# Altium PCB ArgoFCRev2.PcbDoc (part 3 of 6)
Units mm, origin at the board's own origin, x right, y up, seen from the top; angles counter-clockwise.
Board outline 140.21 x 119.63 mm, 4 copper layers (Top Layer, GND Plane, PWR Plane, Bottom Layer), stack 0.603 mm thick; 413 components, 223 nets, 1421 pads, 793 vias.
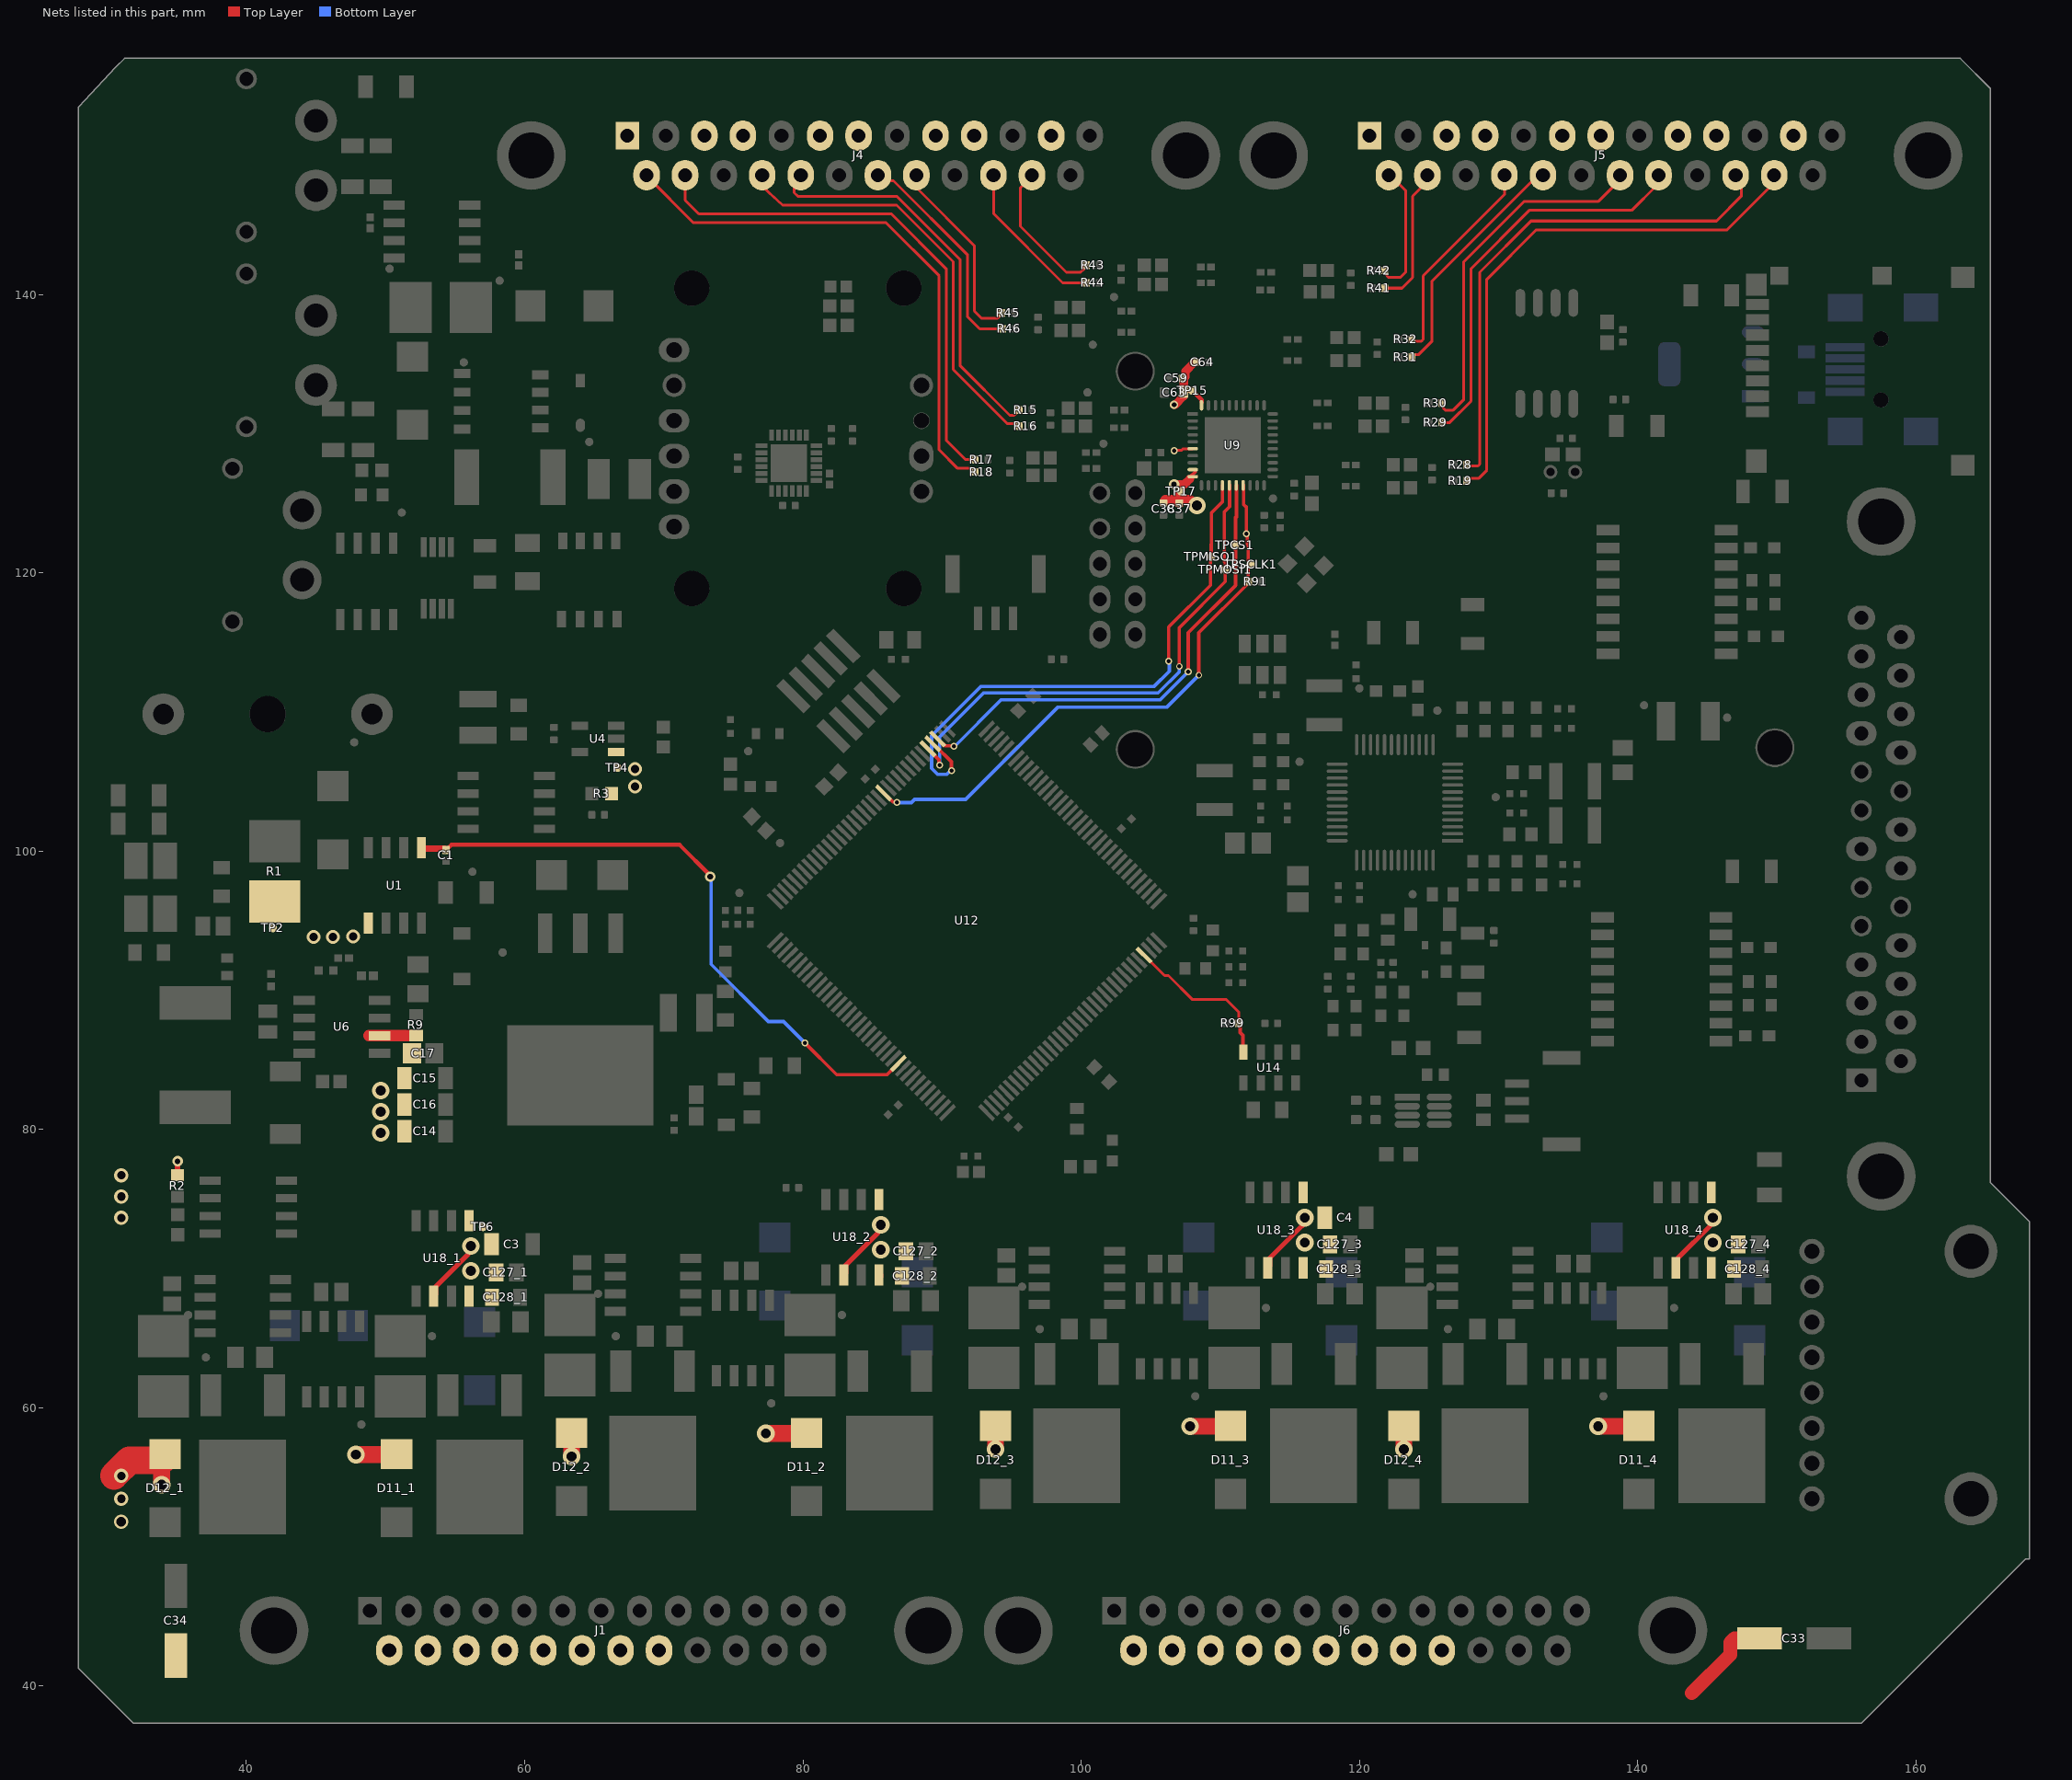
[diagram p4: the nets of this part, all layers, seen from the top]

## Part data (continued)
R49: library part CMP-009-00199-1, "Chip Resistor, 120 Ohm, +/- 1%, 100 mW, -55 to 155 degC, 0603 (1608 Metric)", Case/Package=0603, Max Operating Temperature=155°C, Min Operating Temperature=-55°C, Power=100mW, Tolerance=1%, Voltage Rating=75V, Mounting Technology=SM, Pins=2, RoHS Compliant=True
R51 R52 R60 R62 R64 R73 R74 R76: library part CMP-2000-04818-3, "RES 10KΩ 1.00% 0.1W 0603", Case Code (Imperial)=0603, Case Code (Metric)=1608, Max Operating Temperature=155°C, Max Power Dissipation=100mW, Min Operating Temperature=-55°C, Package Quantity=1, Ratings=AEC-Q200, Resistance=10kR, Resistor Type="Thick Film", Temperature Coefficient=100ppm/°C, Tolerance=1%, Voltage Rating=50V, Case/Package=0603, Construction=Rectangular, Depth=0.8mm, Features="Moisture Resistant", Height=0.45mm, Lead Free="Lead Free", Length=1.6mm, Military Standard=Not, Mount="Surface Mount", Number of Terminations=2, Packaging="Tape and Reel", Power Rating=100mW, RoHS Compliant=Yes, Series=AC, Size Code=0603, Termination=SMD/SMT, Width=0.8mm
R53 R59: library part CMP-2001-00644-1, "4.7 kOhms ±0.1% 0.125W, 1/8W Chip Resistor 0805 (2012 Metric) Automotive AEC-Q200 Thin Film", Manufacturer=Panasonic, Part Number=ERA6AEB472V
R54: library part CMP-2001-04399-1, "11.8 kOhms ±1% 0.125W, 1/8W Chip Resistor 0805 (2012 Metric) Automotive AEC-Q200 Thick Film", Manufacturer=Panasonic, Part Number=ERJ-6ENF1182V
R55 R56 R57 R58 R69 R70 R71 R72: library part CMP-2000-04466-2, "RES SMD 49.9 OHM 0.1% 1/10W 0603", Manufacturer=Yageo, Manufacturer Part Number=RT0603BRD0749R9L, Package=RT0603, Power Rating=0.1W, Temperature="-55°C to +155°C", Temperature Coefficient="25 ppm/°C", Temperature Range High=+155°C, Temperature Range Low=-55°C, Tolerance=0.001, Voltage Rating=75V, Automotive=No, Category=Res, ComponentLink2Description=Datasheet, ComponentLink2URL=http://www.yageo.com/documents/recent/PYu-RT_1-to-0.01_RoHS_L_9.pdf, Composition="Thin Film", Device Class L1="Passive Components", Device Class L2=Resistors, Device Class L3="Chip SMD Resistors", Digikey Description="RES SMD 49.9 OHM 0.1% 1/10W 0603", Footprint Url=http://www.yageo.com/exep/pages/download/literatures/PYu-R_Mount_10.pdf, Height=0.55mm, Ipc Land Pattern Name=RESC16080X45, Lead Free=Yes, Mouser Description="Res Thin Film 0603 49.9 Ohm 0.1% 1/10W ±25ppm/°C Molded SMD SMD Paper T/R", Octopart=https://octopart.com/rt0603brd0749r9l-yageo-1274115, Resistance=49.9Ω, RoHS=TRUE, Series=RT
R61 R65 R75: library part CMP-009-00014-5, "Chip Resistor, 1 KOhm, +/-1%, 0.1 W, -55 to 155 degC, 0603 (1608 Metric)", Case/Package=0603, Max Operating Temperature=155°C, Min Operating Temperature=-55°C, Power=100mW, Tolerance=1%, Voltage Rating=50V, Mounting Technology=SM, Pins=2, RoHS Compliant=True
R63 R66 R67 R68 R78 R79 R80 R82: library part CMP-03412-022448-1, "RES SMD 75 OHM 0.5% 1/10W 0603", Manufacturer=Yageo, Manufacturer Part Number=RT0603DRE0775RL, Package=RT0603, Power Rating=0.1W, Temperature="-55°C to +155°C", Temperature Coefficient="50 ppm/°C", Temperature Range High=+155°C, Temperature Range Low=-55°C, Tolerance=0.005, Voltage Rating=75V, Automotive=No, Category=Res, ComponentLink2Description=Datasheet, ComponentLink2URL=http://www.yageo.com/documents/recent/PYu-RT_1-to-0.01_RoHS_L_9.pdf, Composition="Thin Film", Device Class L1="Passive Components", Device Class L2=Resistors, Device Class L3="Chip SMD Resistors", Digikey Description="RES SMD 75 OHM 0.5% 1/10W 0603", Footprint Url=http://www.yageo.com/exep/pages/download/literatures/PYu-R_Mount_10.pdf, Height=0.55mm, Ipc Land Pattern Name=RESC16080X45, Lead Free=Yes, Octopart=https://octopart.com/rt0603dre0775rl-yageo-1170737, Resistance=75Ω, RoHS=TRUE, Series=RT
R77 R81 R83 R84: library part CMP-03412-006815-1, "RES SMD 220 OHM 1% 1/10W 0603", Manufacturer=Yageo, Manufacturer Part Number=RT0603FRE07220RL, Package=RT0603, Power Rating=0.1W, Temperature="-55°C to +155°C", Temperature Coefficient="50 ppm/°C", Temperature Range High=+155°C, Temperature Range Low=-55°C, Tolerance=0.01, Voltage Rating=75V, Automotive=No, Category=Res, ComponentLink2Description=Datasheet, ComponentLink2URL=http://www.yageo.com/documents/recent/PYu-RT_1-to-0.01_RoHS_L_9.pdf, Composition="Thin Film", Device Class L1="Passive Components", Device Class L2=Resistors, Device Class L3="Chip SMD Resistors", Digikey Description="RES SMD 220 OHM 1% 1/10W 0603", Footprint Url=http://www.yageo.com/exep/pages/download/literatures/PYu-R_Mount_10.pdf, Height=0.55mm, Ipc Land Pattern Name=RESC16080X45, Lead Free=Yes, Mouser Description="Thin Film Resistors 1/10W 220 ohm 1% 50ppm", Octopart=https://octopart.com/rt0603fre07220rl-yageo-39861932, Resistance=220Ω, RoHS=TRUE, Series=RT
R101: library part CMP-2003-04797-2, "RES Thick Film, 0Ω, 0.25W, 1206", Case Code (Imperial)=1206, Case Code (Metric)=3216, Max Operating Temperature=155°C, Max Power Dissipation=250mW, Min Operating Temperature=-55°C, Package Quantity=10000, Resistance=0mR, Voltage Rating=200V, Case/Package=1206, Composition="Thick Film", Contact Plating=Tin, Depth=1.6mm, Features="Automotive AEC-Q200", Height=0.024inch, Lead Free="Lead Free", Length=3.2mm, Military Standard=Not, Number of Terminations=2, Packaging="Tape and Reel", Power Rating=250mW, Radiation Hardening=No, Termination=SMD/SMT, Voltage Rating (DC)=200V, Weight=0.000353oz, Width=0.063inch
R106: library part CMP-26527-004126-1, "0Ω ±Jumper 0.5W 1210 Thick Film Chip Resistor AEC-Q200 compliant / Don't PCBA this", Case Code (Imperial)=1210, Case Code (Metric)=3225, Max Operating Temperature=155°C, Max Power Dissipation=500mW, Min Operating Temperature=-55°C, Power Rating=330mW, Resistance=0R, Resistor Type="Thick Film", Tolerance=1%, Case/Package=1210, Contact Plating=Tin, Features="Automotive AEC-Q200", Height=0.028inch, Lead Free="Lead Free", Length=0.126inch, Mount="Surface Mount", Number of Terminations=2, Packaging="Tape and Reel", Radiation Hardening=No, RoHS Compliant=Yes, Series=RMCF, Size Code=1210, Width=0.098inch
R107: library part CMP-03412-033857-1, "RES SMD 10 OHM 1% 1W 2512", Manufacturer=Yageo, Manufacturer Part Number=AC2512FK-0710RL, Package=AC2512, Power Rating=1W, Resistance=10Ω, Temperature="-55°C to +155°C", Temperature Range High=+155°C, Temperature Range Low=-55°C, Tolerance=0.01, Voltage Rating=200V, Automotive=Yes, Automotive Grade="Grade 0", Category=Res, ComponentLink2Description=Datasheet, ComponentLink2URL=http://www.yageo.com/documents/recent/PYu-AC_51_RoHS_L_6.pdf, Composition="Thick Film", Device Class L1="Passive Components", Device Class L2=Resistors, Device Class L3="Chip SMD Resistors", Digikey Description="RES SMD 10 OHM 1% 1W 2512", Footprint Url=http://www.yageo.com/exep/pages/download/literatures/PYu-R_Mount_10.pdf, Height=0.65mm, Ipc Land Pattern Name=RESC635310X55, Lead Free=Yes, Octopart=https://octopart.com/ac2512fk-0710rl-yageo-71369736, RoHS=TRUE, Series=AC
R108: library part CMP-03211-004788-1, "CRGP 1206 10K 1%       / 1206W4F1002T5E", Ambient Temperature Range High=+70°C, Manufacturer=TE, Manufacturer Part Number=CRGP1206F10K, Package=CRGP1206, Power Rating=0.5W, Resistance=10KΩ, Temperature="-55°C to +155°C", Temperature Coefficient=±100ppm/°C, Temperature Range High=+155°C, Temperature Range Low=-55°C, Tolerance=0.01, Voltage Rating=200V, Automotive=No, Category=Res, ComponentLink2Description=Datasheet, ComponentLink2URL=https://www.mouser.com/datasheet/2/418/NG_DS_9-1773463-9_A-1358566.pdf, Composition="Thick Film", Device Class L1="Passive Components", Device Class L2=Resistors, Device Class L3="Chip SMD Resistors", Digikey Description="CRGP 1206 10K 1%", Height=0.65mm, Ipc Land Pattern Name=RESC310155X55, Lead Free=Yes, Octopart=https://octopart.com/crgp1206f10k-te+connectivity-91018843, RoHS=TRUE, Series=CRGP
RT1: library part CMP-06022-000553-2, "NTC Thermistor for Temperature Sensor, 0603, 47kΩ, 5%, 0.046mA, 5V", Case Code (Imperial)=0603, Case Code (Metric)=1608, Current Rating=140uA, Max Operating Temperature=125°C, Max Power Dissipation=100mW, Min Operating Temperature=-40°C, Package Quantity=4000, Resistance=47kR, Resistance Tolerance=5%, Accuracy=0.5%, Case/Package=0603, Depth=0.8mm, Height=0.8mm, Lead Free="Lead Free", Length=1.6mm, Mount="Surface Mount", Number of Pins=2, Packaging="Tape and Reel", Power Rating=100mW, Radiation Hardening=No, REACH SVHC="No SVHC", Series=NCP, Termination=SMD/SMT, Thickness=150um, Tolerance=5%, Width=0.8mm
T1 T2: library part CMP-2000-05323-2, "MODULE XFRMR SGL ETHR LAN 16SOIC", Case/Package=Module, DC Resistance (DCR)=1.5R, Isolation Voltage=1.5kV, Max Operating Temperature=85°C, Min Operating Temperature=-40°C, Package Quantity=40, Depth=9.53mm, Height=5.97mm, Height - Seated (Max)=6.22mm, Insertion Loss=-1dB, Lead Free="Lead Free", Lead/Base Style="Gull Wing", Length=12.7mm, Mount="Surface Mount", Number of Pins=16, Packaging=Rail/Tube, Radiation Hardening=No, Return Loss=-12dB, RoHS Compliant=Yes, Series=-, Shielding=Unshielded, Termination=SMD/SMT, Turns Ratio=1:1, Width=7.11mm
U1 U17_1 U17_2 U17_3 U17_4 U19_1 U19_2 U19_3 U19_4 U20: "Integrated Circuit", Manufacturer_Name="Texas Instruments", Mouser Part Number=595-INA240A4DR, Arrow Part Number=INA240A4DR, Arrow Price/Stock=https://www.arrow.com/en/products/ina240a4dr/texas-instruments?region=nac, Datasheet Link=http://www.ti.com/lit/gpn/ina240, Height=1.75mm, Manufacturer_Part_Number=INA240A4DR, Mouser Price/Stock=https://www.mouser.co.uk/ProductDetail/Texas-Instruments/INA240A4DR?qs=AQlKX63v8RvMrT%252BbhA5gog%3D%3D
U2 U3 U22: library part CMP-014-00017-2, "Single Supply Dual Operational Amplifier, 3 to 32 V, 0 to 70 degC, 8-Pin SOIC, Pb-Free, Tape and Reel", Case/Package=SOIC, Manufacturer="ON Semiconductor", Max Dual Supply Voltage=16V, Max Input Voltage=28.3V, Max Operating Temperature=70°C, Max Supply Voltage=44V, Min Dual Supply Voltage=1.5V, Min Input Voltage=0uV, Min Operating Temperature=0°C, Min Supply Voltage=2.3V, Nominal Dual Supply Voltage=12V, Nominal Supply Current=35uA, Nominal Voltage Gain=100dB, Output Current=40mA, Package Description="8-Pin Small Outline Integrated Circuit, Body 4.9 x 3.9 mm, Pitch 1.27 mm", Package Quantity=2500, Package Reference=SOIC-8-751-07, Channels=2, Common Mode Rejection Ratio=65dB, Datasheet URL=http://www.onsemi.cn/pub_link/Collateral/LM358-D.PDF, Datasheet Version="Rev. 32, 10/2016", Manufacturer URL=http://www.onsemi.com/, Mounting Technology=SM, Nominal Gain Bandwith Product=200KHz, Nominal Supply Voltage=12V, Packaging=TapeandReel, Pins=8, RoHS Compliant=True, Slew Rate=0.07V/us
U4: "Integrated Circuit", Manufacturer_Name=Silergy, Datasheet Link=https://datasheet.lcsc.com/szlcsc/Silergy-Corp-SY6280AAAC_C207620.pdf, Height=1.4mm, Manufacturer_Part_Number=SY6280AAAC
U5: library part CMP-0062-00591-5, "5A Low Dropout Positive Regulators, 3-pin TO-263, Pb-Free", Manufacturer="Texas Instruments", PackageTopMarking=NSUZXYTTE#*LM1084*IS-3.3, PartNumber=LM1084IS-3.3/NOPB, PowerWise=N, Code_JEDEC=MO-169-AA, ComponentLink1Description="Datasheet URL", ComponentLink1URL=http://www.ti.com/general/docs/lit/getliterature.tsp?genericPartNumber=LM1084&fileType=pdf, CompType="LDO IC", High-Reliability=Y, PackageDescription="TO-263, Molded, .400 x .390 x .180in, 3 Lead, .1in Pitch, Surface Mount", PackageReference=KTT0003B, PinCount=3, RoHS=Y
U6: "Integrated Circuit", Manufacturer_Name="Texas Instruments", Mouser Part Number=595-TPS54331DR, Arrow Part Number=TPS54331DR, Arrow Price/Stock=https://www.arrow.com/en/products/tps54331dr/texas-instruments?utm_currency=USD&region=nac, Datasheet Link=http://www.ti.com/lit/gpn/tps54331, Height=1.75mm, Manufacturer_Part_Number=TPS54331DR, Mouser Price/Stock=https://www.mouser.co.uk/ProductDetail/Texas-Instruments/TPS54331DR?qs=QyYHynRG50rsSYcB%2Ftz4Yw%3D%3D
U7: library part CMP-12153-000006-1, "IC REG LINEAR 3.3V 1.2A SOT223", Dropout Voltage=350mV, Manufacturer=STMicroelectronics, Max Junction Temp=+125°C, Max Supply Voltage=18V, Min Supply Voltage=2.6V, Nominal Supply Current=250uA, Output Current=2A, Output Voltage=3.3V, Package=SOT223-0046067, Temperature="-40°C to +125°C", Temperature Range Low=-40°C, Accuracy Percentage=2%, Automotive=No, Category=IC, ComponentLink2Description=Datasheet, ComponentLink2URL=https://www.st.com/resource/en/datasheet/ldl1117.pdf, Device Class L1="Integrated Circuits (ICs)", Device Class L2="Power Management ICs", Device Class L3="Voltage Regulators - Linear", Digikey Description="IC REG LINEAR 3.3V 1.2A SOT223", Height=1.9mm, Ipc Land Pattern Name=SOT230P700X190-4, Lead Free=Yes, Manufacturer Part Number=LDL1117S33R, Mouser Description="LDL1117 Series 1.2 A 3.3 V High PSRR LDO Linear Voltage Regulator-SOT-223", Number Of Outputs=1, Octopart=https://octopart.com/ldl1117s33r-stmicroelectronics-81876163, Output Type=Fixed, RoHS=TRUE, Standoff Height=0.02mm, Temperature Range High=+125°C
U8: library part CMP-0378-00041-1, "16 Mbit SPI Serial Flash, 2.7 to 3.6 V, 50 MHz, 0 to 70 degC, 8-pin SOIC (S2A8), Tube", Manufacturer=Microchip, ComponentLink1Description="Manufacturer URL", ComponentLink1URL=http://www.microchip.com, ComponentLink2Description=Datasheet, ComponentLink2URL=http://ww1.microchip.com/downloads/en/DeviceDoc/25044A.pdf, ComponentLink3Description="Package Specification", ComponentLink3URL=http://ww1.microchip.com/downloads/en/DeviceDoc/25051A.pdf, ComponentLink4Description="Product URL", ComponentLink4URL=http://www.microchip.com/SST25VF016B, DatasheetVersion="Rev. A", Mounting Technology="Surface Mount", PackageDescription="8-Lead Plastic Small Outline Intergrated Circuit, 5.275 x 5.275 mm Body, 1.27 mm Pitch", PackageReference=SOIC-S2A8, PackageVersion="Rev. A", PartNumber=SST25VF016B-50-4C-S2AF
U9: library part CMP-09081-000008-1, "IC ADC 24BIT SIGMA-DELTA 40LFCSP", Case/Package="LFCSP EP", Max Input Voltage=2.5V, Max Operating Temperature=105°C, Max Power Dissipation=28mW, Max Supply Voltage=5.5V, Min Operating Temperature=-40°C, Min Supply Voltage=2V, Nominal Supply Current=2.12mA, Operating Supply Voltage=5V, Package Quantity=490, Power Dissipation=9.96mW, Contact Plating=Tin, Height=0.75mm, Interface=SPI, Lead Free="Contains Lead", Length=6.1mm, Min Input Voltage=2.5V, Mount="Surface Mount", Number of A/D Converters=1, Number of Bits=24, Number of Channels=16, Number of Converters=1, Number of Elements=1, Number of Pins=40, Output Type=TTL, Packaging=Tray, Polarity=Bipolar, REACH SVHC="No SVHC", Reference Voltage=2.5V, Resolution=24b, Sampling Rate=31.25KS/s, Supply Type=Single, Width=6.1mm
U10: library part CMP-04872-000203-1, "IC TRANSCEIVER 1/1 SOT23-8", Case/Package=SOT-23-8, Max Operating Temperature=125°C, Min Operating Temperature=-40°C, Lead Free="Lead Free", Mount="Surface Mount", Packaging="Tape and Reel", Receiver Hysteresis=120mV, RoHS Compliant=Yes
U11: library part CMP-06281-000067-1, "IC ETHERNET SWITCH 3PORT 48-LQFP", Case/Package=LQFP, Max Operating Temperature=85°C, Max Supply Current=114mA, Max Supply Voltage=3.465V, Min Operating Temperature=-40°C, Min Supply Voltage=1.71V, Nominal Supply Current=85mA, Operating Supply Voltage=3.3V, Package Quantity=250, Data Rate=100Mbps, Height=1.45mm, Interface=I2C, Lead Free="Lead Free", Length=7.1mm, Mount="Surface Mount", Number of Functions=3, Number of Pins=48, Number of Ports=3, Number of Transceivers=3, Packaging=Tray, Radiation Hardening=No, REACH SVHC="No SVHC", RoHS Compliant=Yes, Series=-, Supply Current=85mA, Supply Voltage-Nom=3.3V, Width=7.1mm
U12: "Integrated Circuit / https://www.allelcoelec.com/productdetails/STMicroelectronics/STM32H743ZIT6.html?gad_source=1&gad_campaignid=21002909653&gclid=CjwKCAjw4efDBhATEiwAaDBpbvLpcbmne3WKOXgEcIaqaVpz5lcgSvxb9vCyHUjI6dfgnmkW9JZCHhoCY-cQAvD_BwE", Manufacturer_Name=STMicroelectronics, Mouser Part Number=511-STM32H743ZIT6, Arrow Part Number=STM32H743ZIT6, Arrow Price/Stock=https://www.arrow.com/en/products/stm32h743zit6/stmicroelectronics?utm_currency=USD&region=nac, Datasheet Link=https://www.st.com/resource/en/datasheet/stm32h743zi.pdf, Height=1.6mm, Manufacturer_Part_Number=STM32H743ZIT6, Mouser Price/Stock=https://www.mouser.co.uk/ProductDetail/STMicroelectronics/STM32H743ZIT6?qs=FNcb6ahWXRyuf15GdgTu%252Bw%3D%3D
U13: "Integrated Circuit", Manufacturer_Name=TDK, Datasheet Link=https://invensense.tdk.com/wp-content/uploads/2015/02/MPU-6000-Datasheet1.pdf, Height=0.95mm, Manufacturer_Part_Number=MPU6050
U14: "Integrated Circuit", Manufacturer_Name="TE Connectivity", Mouser Part Number=824-MS560702BA03-50, Arrow Part Number=MS560702BA03-50, Arrow Price/Stock=https://www.arrow.com/en/products/ms560702ba03-50/te-connectivity?utm_currency=USD&region=europe, Datasheet Link=https://www.te.com/commerce/DocumentDelivery/DDEController?Action=srchrtrv&DocNm=MS5607-02BA03&DocType=Data%20Sheet&DocLang=English&PartCntxt=MS560702BA03-50&DocFormat=pdf, Manufacturer_Part_Number=MS560702BA03-50, Mouser Price/Stock=https://www.mouser.co.uk/ProductDetail/Measurement-Specialties/MS560702BA03-50?qs=urSpXqmdEVImCZG1H%252BT8ng%3D%3D
U15: "Connector", Manufacturer_Name=Adafruit, Datasheet Link=https://learn.adafruit.com/downloads/pdf/adafruit-bno055-absolute-orientation-sensor.pdf, Height=2mm, Manufacturer_Part_Number=00472
U16: "Integrated Circuit", Manufacturer_Name=Adafruit, Mouser Part Number=485-3966, Arrow Part Number=3966, Arrow Price/Stock=https://www.arrow.com/en/products/3966/adafruit-industries?region=nac, Datasheet Link=https://media.digikey.com/pdf/Data%20Sheets/Adafruit%20PDFs/3966_Web.pdf, Height=3mm, Manufacturer_Part_Number=3966, Mouser Price/Stock=https://www.mouser.co.uk/ProductDetail/Adafruit/3966?qs=byeeYqUIh0NfTW%2FTrOin4A%3D%3D
U18_1 U18_2 U18_3 U18_4: "Integrated Circuit", Manufacturer_Name="Texas Instruments", Mouser Part Number=595-UCC27624DR, Arrow Part Number=UCC27624DR, Arrow Price/Stock=https://www.arrow.com/en/products/ucc27624dr/texas-instruments?utm_currency=USD&region=nac, Datasheet Link=https://www.ti.com/lit/ds/symlink/ucc27624.pdf?ts=1654150888910&ref_url=https%253A%252F%252Fwww.ti.com%252Fproduct%252FUCC27624, Height=1.75mm, Manufacturer_Part_Number=UCC27624DR, Mouser Price/Stock=https://www.mouser.co.uk/ProductDetail/Texas-Instruments/UCC27624DR?qs=Rp5uXu7WBW%2FHvRoPIZ55DQ%3D%3D
U21: "Integrated Circuit, LTC4359IMS8 and LTC4359HMS8 share same package", Manufacturer_Name="Analog Devices", Mouser Part Number=584-LTC4359HMS8#PBF, Arrow Part Number=LTC4359HMS8#PBF, Arrow Price/Stock=https://www.arrow.com/en/products/ltc4359hms8pbf/analog-devices?utm_currency=USD&region=nac, Datasheet Link=http://cds.linear.com/docs/en/datasheet/4359fb.pdf, Height=1.1mm, Manufacturer_Part_Number=LTC4359HMS8#PBF, Mouser Price/Stock=https://www.mouser.co.uk/ProductDetail/Analog-Devices/LTC4359HMS8PBF?qs=hVkxg5c3xu%2FqZugm8lkYHw%3D%3D
XF1: library part CMP-1502-00234-1, "WR-FSH Fuse Holder Blocks Fuse Holder Blocks Clip Cover for PCB", Manufacturer="Wurth Elektronik", Operating Temperature=-30to120degC, Datasheet URL=https://katalog.we-online.de/em/datasheet/696105003002.pdf, Fuse Size=5x20mm, Manufacturer URL=http://www.we-online.de, Mounting Technology=THT, Package Reference=696105003002, Packaging=Box, Part Number=696105003002, Publisher=WurthElektronik

## Free pads (board coordinates)
  round 1 hole 0.6: 7(135.509,127.254) 8(133.731,127.254)
  round 1.5 hole 1: CLKo(101.346,125.73) WOL(101.346,123.19)
  oval 1.5x2 hole 1: CS(101.346,118.11) GND(103.886,115.57) MISO(103.886,123.19) MOSI(101.346,120.65) RST(103.886,118.11) SCK(103.886,120.65) VCC(101.346,115.57)
  oval 1.4x2 hole 1: INT(103.886,125.73)
  round 2.8 hole 2.5: ""(103.886,107.315) ""(103.886,134.493) ""(149.86,107.442)

## Via types
v1: diameter 0.5, hole 0.3, Top Layer to Bottom Layer, 278 vias
v2: diameter 0.45, hole 0.3, Top Layer to Bottom Layer, 146 vias
v3: diameter 0.75, hole 0.4, Top Layer to Bottom Layer, 103 vias
v4: diameter 1.27, hole 0.711, Top Layer to Bottom Layer, 101 vias
v5: diameter 1, hole 0.6, Top Layer to Bottom Layer, 86 vias
v6: diameter 0.6, hole 0.3, Top Layer to Bottom Layer, 31 vias
v7: diameter 0.7, hole 0.4, Top Layer to Bottom Layer, 19 vias
v8: diameter 0.6, hole 0.35, Top Layer to Bottom Layer, 8 vias
v9: diameter 0.9, hole 0.5, Top Layer to Bottom Layer, 7 vias
v10: diameter 0.6, hole 0.4, Top Layer to Bottom Layer, 4 vias
v11: diameter 3.3, hole 3.3, Top Layer to Bottom Layer, 4 vias
v12: diameter 0.65, hole 0.4, Top Layer to Bottom Layer, 2 vias
v13: diameter 0.75, hole 0.45, Top Layer to Bottom Layer, 1 vias
v14: diameter 1.2, hole 0.7, Top Layer to Bottom Layer, 1 vias
v15: diameter 1, hole 0.711, Top Layer to Bottom Layer, 1 vias
v16: diameter 3.2, hole 3.2, Top Layer to Bottom Layer, 1 vias

## Nets (pads, with @x,y where several pads share a name; then routed paths per layer and width w, separated by ;. In a path a pad name is that pad's centre, name@x,y a point inside that pad or via, vN(x,y) a via of type N, cw(c..) or ccw(c..) an arc to the next point about the centre after c; other vN are vias at no path point)
5V: C37.1 C38.1 C59.1 C63.1 C64.1 J4.1 J4.3 J4.4 J4.6 J4.7 J4.9 J4.10 J4.12 J5.1 J5.3 J5.4 J5.6 J5.7 J5.9 J5.10 J5.12 R3.2 TP4.1 TP15.1 TP17.1 U4.1 U9.9 U9.10 U9.40 | length 11.4
  Top Layer w0.254: 107.429,126.365 107.475,126.365 ; 107.696,126.746 107.871,126.921 108.204,127.254
  Top Layer w0.3: C63.1@107.375,133.096 107.382,133.096 TP15.1@108,133.096 108.661,132.435 U9.40@108.661,132.277
  Top Layer w0.35: TP17.1@107.061,125.662 107.188,125.789 TP17.1@107.188,125.857 ; 107.236,126.171 107.429,126.365
  Top Layer w0.6: v3(106.68,126.365) 107.429,126.365 107.81,126.746 ; v8(106.68,132.08) 106.744,132.08 107.35,132.685 107.35,132.939 C63.1@107.38,132.969 ; C37.1@107.061,125.037 TP17.1@107.061,125.662 ; TP17.1@107.188,125.857 107.188,126.365 ; C63.1@107.382,132.971 107.382,133.096 107.382,133.985 107.507,134.11 107.507,134.498 C64.1@108.137,135.128
  Top Layer w0.762: C38.1@106.045,125.222 106.876,125.222 C37.1@107.061,125.037 ; C37.1@107.246,125.222 107.454,125.222 107.581,125.222 107.813,125.222 108.194,124.841 v4(108.331,124.841)
  other v5: 67.945,104.648 67.945,105.918
24V_Current: C1.2 U1.5 U12.26 | length 45.5
  Top Layer w0.254: v1(80.137,86.233) 82.423,83.947 86.05,83.947 U12.26@86.954,84.851
  Top Layer w0.3: C1.2@54.356,100.105 54.476,100.225 54.505,100.225 54.737,100.457 71.14,100.457 73.339,98.258 v3(73.339,98.171)
  Top Layer w0.45: U1.5@52.603,100.18 C1.2@54.252,100.18
  Bottom Layer w0.254: v3(73.339,98.171) 73.406,98.104 73.406,91.88 77.529,87.757 78.613,87.757 v1(80.137,86.233) v1@80.264,86.106
24Vin: C3.1 C4.1 C14.1 C15.1 C16.2 C17.2 C33.2 C34.2 C127_1.2 C127_2.2 C127_3.2 C127_4.2 C128_1.1 C128_2.1 C128_3.1 C128_4.1 D11_1.1 D11_2.1 D11_3.1 D11_4.1 D12_1.1 D12_2.1 D12_3.1 D12_4.1 J1.14 J1.15 J1.16 J1.17 J1.18 J1.19 J1.20 J1.21 J6.14 J6.15 J6.16 J6.17 J6.18 J6.19 J6.20 J6.21 J6.22 R1.1 R2.2 R9.2 TP2.1 TP6.1 U1.1 U6.2 U18_1.1 U18_1.6 U18_1.8 U18_2.1 U18_2.6 U18_2.8 U18_3.1 U18_3.6 U18_3.8 U18_4.1 U18_4.6 U18_4.8 | length 48.3
  Top Layer w0.35: U18_1.6@53.467,68.027 53.617,68.177 53.617,68.73 55.958,71.071 55.958,71.452 v4(56.134,71.628) ; U18_2.6@82.931,69.551 83.081,69.701 83.081,70.254 85.422,72.595 85.422,72.976 v4(85.598,73.152) ; U18_3.6@113.411,70.059 113.561,70.209 113.561,70.762 115.902,73.103 115.902,73.484 v4(116.078,73.66) ; U18_4.6@142.748,70.059 142.898,70.209 142.898,70.762 145.239,73.103 145.239,73.484 v4(145.415,73.66)
  Top Layer w0.4: R2.2@35.052,76.708 v3@35.052,77.47
  Top Layer w0.6: U18_1.8@56.007,67.908 U18_1.8@56.007,68.027 ; U18_2.8@85.471,69.432 U18_2.8@85.471,69.551 ; U18_3.8@115.951,69.94 U18_3.8@115.951,70.059 ; U18_4.8@145.288,69.94 U18_4.8@145.288,70.059
  Top Layer w0.8: 48.8,86.753 R9.2@52.197,86.753
  Top Layer w1: 143.891,39.497 146.657,42.263 146.657,43.134 146.957,43.434 C33.2@148.157,43.434
  Top Layer w1.2: v4(33.909,54.483) D12_1.1@33.909,56.229 ; v4(47.879,56.642) D11_1.1@50.038,56.642 ; v4(63.373,56.515) D12_2.1@63.373,57.912 ; v4(77.343,58.166) D11_2.1@79.502,58.166 ; v4(93.853,57.023) D12_3.1@93.853,58.42 ; v4(107.823,58.674) D11_3.1@109.982,58.674 ; v4(123.19,57.023) D12_4.1@123.19,58.42 ; v4(137.16,58.674) D11_4.1@139.319,58.674
  Top Layer w2: 30.48,55.118 31.591,56.229 D12_1.1@33.909,56.229
  other v3: 35.052,77.724
  other v4: 56.134,69.85 85.598,71.374 116.078,71.882 145.415,71.882 49.657,79.756 49.657,81.28 49.657,82.804
  other v5: 31,53.467 31,55.118 31,73.66 31,75.184 31,76.708 44.831,93.853 46.228,93.853 47.668,93.872
  other v15: 31,51.816
ADC_CS_3.3V: R91.2 TPSCLK1.1 U9.17 U12.122 | length 41.5
  Top Layer w0.24: v2(108.458,112.649) 108.458,115.697 112,119.239 112,122 ; U9.17@111.666,126.295 111.666,124.935 111.887,124.714 v1(111.887,122.809) 111.937,122.759 111.937,122.043
  Top Layer w0.254: U12.122@86.106,103.886 86.129,103.886 86.471,103.544 86.698,103.544 v1(86.745,103.496)
  Bottom Layer w0.24: v1(86.745,103.496) 87.804,103.496 88.03,103.723 91.702,103.723 98.342,110.363 106.172,110.363 v2(108.458,112.649)
ADC_MISO_3.3V: TPMISO1.1 U9.14 U12.112 | length 40.3
  Top Layer w0.24: v1(106.299,113.665) 106.299,116.113 109.3,119.114 TPMISO1.1@109.3,121.158 ; TPMISO1.1@109.347,121.158 109.347,122.047 109.354,122.054 109.354,124.297 110.166,125.11 U9.14@110.166,126.295
  Top Layer w0.254: U12.112@89.535,107.569 90.678,106.426 v1(90.678,105.791)
  Bottom Layer w0.24: v1(90.678,105.791) 90.608,105.791 90.354,105.537 89.659,105.537 89.249,105.948 89.249,108.299 92.8,111.85 105.255,111.85 106.336,112.931 106.336,113.628 v1(106.299,113.665)
ADC_MOSI_3.3V: TPMOSI1.1 U9.15 U12.113 | length 37
  Top Layer w0.24: v2(107.061,113.284) 107.061,116.078 110.363,119.38 110.363,120.777 ; 110.3,120.8 110.3,124.397 110.666,124.763 U9.15@110.666,126.295
  Top Layer w0.254: U12.113@89.408,106.934 89.41,106.932 89.772,106.57 89.772,106.231 v1(89.819,106.184)
  Bottom Layer w0.24: v1(89.819,106.184) 89.819,108.208 92.989,111.379 105.537,111.379 107.061,112.903 v2(107.061,113.284)
ADC_Refout2.5V: U9.6 | length 1.4
  Top Layer w0.2: v1(106.68,128.778) 106.722,128.82 107.23,128.82 107.33,128.92 U9.6@108.04,128.92
ADC_SCLK_3.3V: TPCS1.1 U9.16 U12.111 | length 34.7
  Top Layer w0.24: v1(107.696,112.903) 107.696,115.697 111.1,119.101 111.1,124 ; 111.166,124 U9.16@111.166,126.295
  Top Layer w0.254: U12.111@90.081,107.658 90.135,107.658 90.221,107.572 90.82,107.572 v1(90.843,107.549)
  Bottom Layer w0.24: v1(90.843,107.549) 90.913,107.549 94.235,110.871 105.664,110.871 v1(107.696,112.903)
AIN0: J4.18 R15.1 | length 28.9
  Top Layer w0.2: J4.18@79.845,148.58 79.845,148.147 79.375,147.677 79.375,147.32 79.629,147.066 86.741,147.066 91.313,142.494 91.313,134.874 94.869,131.318 95.181,131.318 95.387,131.524 95.412,131.524 95.562,131.674 R15.1@95.562,131.699
AIN1: J4.17 R16.1 | length 31.5
  Top Layer w0.2: J4.17@76.707,148.934 77.056,148.651 77.056,148.615 J4.17@77.083,148.588 ; J4.17@77.075,148.58 77.106,147.77 77.164,147.712 78.546,146.431 86.741,146.431 90.805,142.367 90.805,134.62 94.705,130.72 95.412,130.72 95.504,130.628 R16.1@95.504,130.429
AIN2: J4.15 R17.1 | length 37.6
  Top Layer w0.2: J4.15@71.535,148.58 71.535,146.778 72.517,145.796 86.36,145.796 90.297,141.859 90.297,129.54 91.694,128.143 R17.1@92.387,128.143
AIN3: J4.14 R18.1 | length 39.7
  Top Layer w0.2: J4.14@68.834,148.463 72.136,145.161 85.979,145.161 89.789,141.351 89.789,128.84 91.121,127.508 92.12,127.508 92.199,127.429 92.237,127.429 92.387,127.279 R18.1@92.387,127.254
AIN4: J5.24 R19.1 | length 39.5
  Top Layer w0.2: R19.1@127.762,126.492 127.762,126.691 127.854,126.783 128.561,126.783 129.159,127.381 129.159,141.097 132.715,144.653 146.431,144.653 J5.24@150.086,148.308
AIN5: J5.23 R28.1 | length 37.6
  Top Layer w0.2: R28.1@127.703,127.738 127.753,127.688 128.534,127.688 128.651,127.805 128.651,141.605 132.334,145.288 145.669,145.288 147.447,147.066 147.447,147.745 147.045,148.147 J5.23@147.045,148.58
AIN6: J5.21 R29.1 | length 29
  Top Layer w0.2: R29.1@125.926,130.81 126.492,130.81 128.016,132.334 128.016,141.859 132.207,146.05 139.573,146.05 141.37,147.847 141.37,147.877 141.721,148.228 J5.21@141.721,148.58
AIN7: J5.20 R30.1 | length 26.4
  Top Layer w0.2: R30.1@125.926,132.207 126.048,132.085 126.048,131.816 126.165,131.699 126.746,131.699 127.508,132.461 127.508,142.367 131.826,146.685 137.16,146.685 J5.20@139.143,148.668
AIN8: J5.18 R31.1 | length 18.1
  Top Layer w0.2: R31.1@123.8,135.357 123.8,135.555 123.917,135.673 124.243,135.673 125.222,136.652 125.222,140.97 132.832,148.58 J5.18@133.195,148.58 ; J5.18@133.058,148.638 133.058,148.933 J5.18@133.351,148.933
AIN9: J5.17 R32.1 | length 15
  Top Layer w0.2: R32.1@123.825,136.652 124.46,136.652 124.587,136.779 124.587,141.351 130.425,147.189 J5.17@130.425,148.58
AIN10: J5.15 R41.1 | length 9.9
  Top Layer w0.2: R41.1@122.058,140.462 123.063,140.462 123.825,141.224 123.825,147.066 124.636,147.877 124.636,148.331 J5.15@124.885,148.58
AIN11: J5.14 R42.1 | length 9.1
  Top Layer w0.2: R42.1@121.793,141.596 121.937,141.596 121.976,141.557 121.976,141.363 122.115,141.224 122.936,141.224 123.317,141.605 123.317,147.485 J5.14@122.384,148.419
AIN12: J4.24 R43.1 | length 10.4
  Top Layer w0.2: J4.24@96.534,148.58 95.631,147.677 95.631,144.907 98.933,141.605 99.949,141.605 100.203,141.859 R43.1@100.203,142.126
AIN13: J4.23 R44.1 | length 11.8
  Top Layer w0.2: J4.23@93.726,148.902 93.726,145.796 98.679,140.843 R44.1@100.364,140.843
AIN14: J4.21 R45.1 | length 13.8
  Top Layer w0.2: J4.21@88.224,148.58 88.224,147.615 92.329,143.51 92.329,138.811 92.837,138.303 93.99,138.303 94.107,138.42 R45.1@94.107,138.751
AIN15: J4.20 R46.1 | length 16.2
  Top Layer w0.2: J4.20@85.344,148.59 85.747,148.187 86.509,148.187 91.821,142.875 91.821,138.43 92.71,137.541 R46.1@94.361,137.541
ALT_SCL: R99.1 U12.69 U14.8 | length 11.7
  Top Layer w0.2: U12.69@104.519,92.534 105.994,91.059 106.277,91.059 107.974,89.362 110.409,89.362 111.321,88.45 R99.1@111.321,87.63
  Top Layer w0.28: R99.1@111.431,87.495 111.431,86.969 111.633,86.767 U14.8@111.633,85.207